# Altium PCB miaow-foc-board.pcbdoc (part 10 of 10)
Units mil, origin at the board's own origin, x right, y up, seen from the top; angles counter-clockwise.
Board outline 2755.91 x 3149.61 mil, 6 copper layers (SIG1, GND2, SIG3, PWR4, GND5, SIG6), stack 60.566 mil thick; 437 components, 392 nets, 2120 pads, 1697 vias.
Unrouted connection lines stored in the file: 1090.
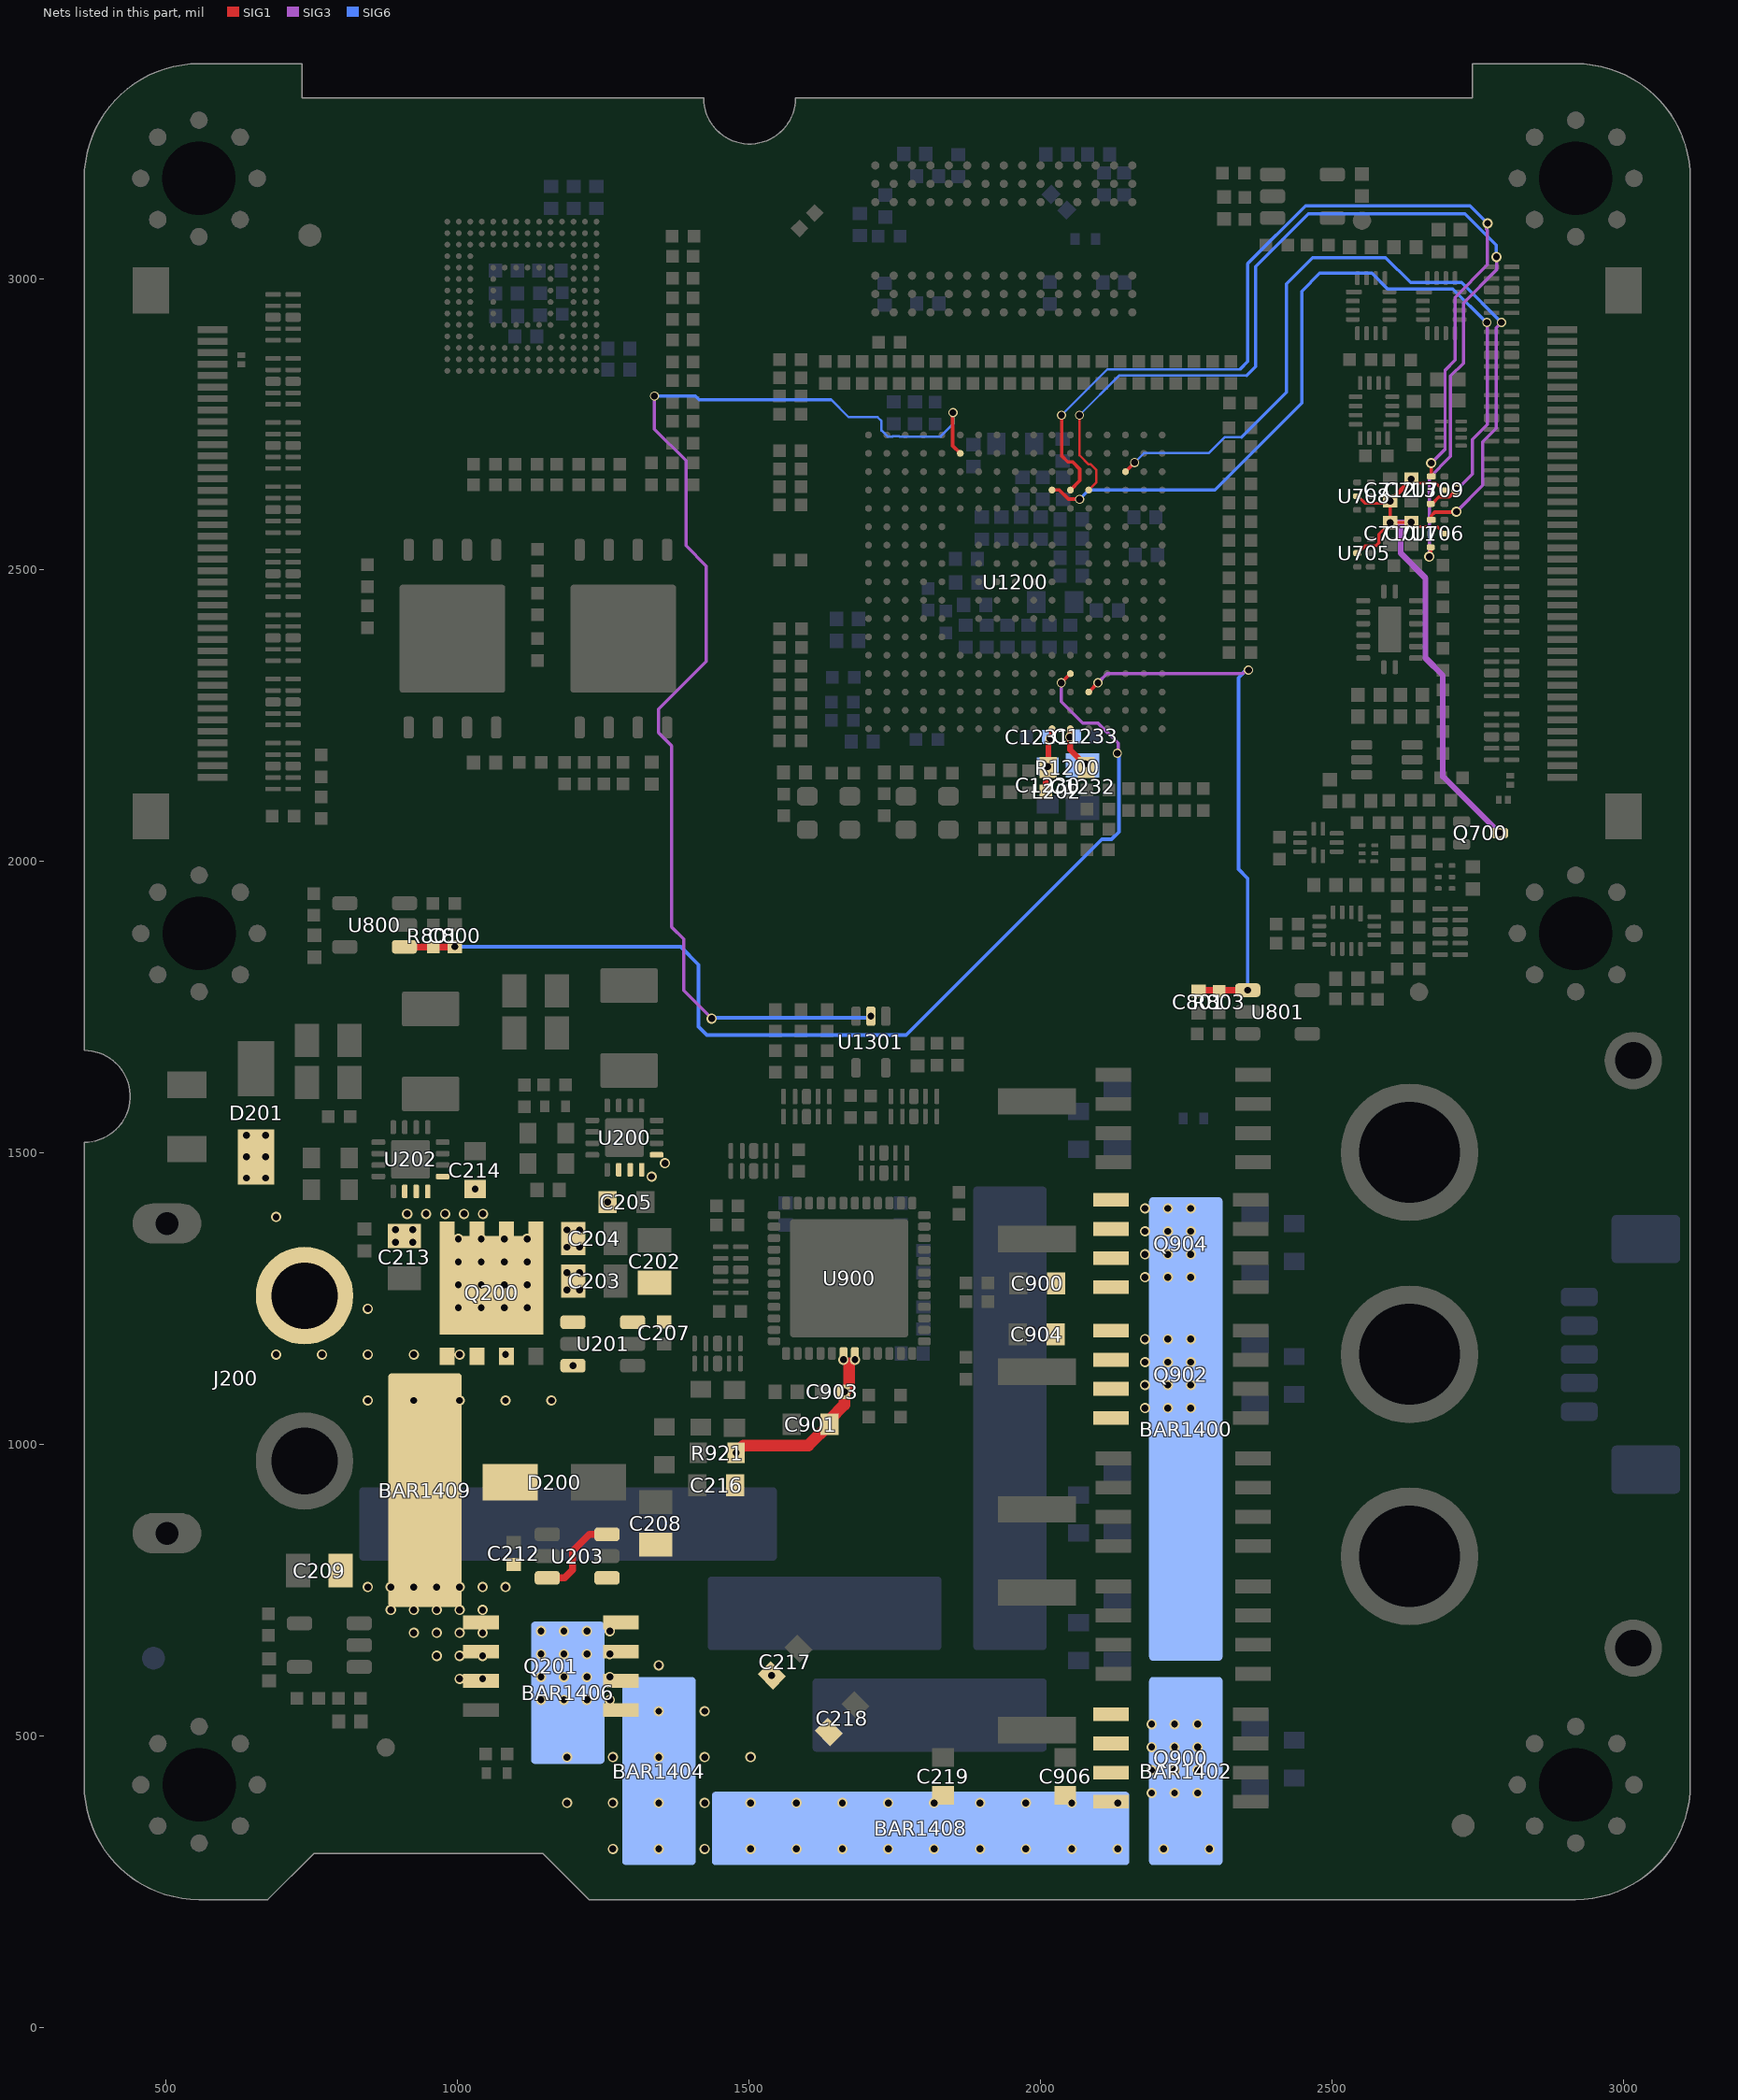
[diagram p13: the nets of this part, all layers, seen from the top]

## Via types
v1: diameter 17.72, hole 11.81, SIG1 to SIG6, tented both sides, 1223 vias
v2: diameter 15.75, hole 11.81, SIG1 to SIG6, tented both sides, 453 vias
v3: diameter 17.72, hole 11.81, SIG1 to SIG6, tented top, 21 vias

## Nets (pads, with @x,y where several pads share a name; then routed paths per layer and width w, separated by ;. In a path a pad name is that pad's centre, name@x,y a point inside that pad or via, vN(x,y) a via of type N, cw(c..) or ccw(c..) an arc to the next point about the centre after c; other vN are vias at no path point) (continued)
TMP_CH0: C801.1 R803.1 U801.1 U1200.N3 | length 942.8
  SIG1 w6: U1200.N3@2083.05,2290.85 v2(2098.79,2306.59)
  SIG1 w12: C801.1@2271.7,1777.69 2273.29,1779.28 v1(2355.75,1779.28)
  SIG3 w6: v2(2098.79,2306.59) 2114.54,2322.34 2347.14,2322.34 2353.14,2328.34 v2@2361.56,2328.34
  SIG6 w6: v1(2355.75,1779.28) 2355.75,1971.05 2339.95,1986.85 2339.95,2315.19 2353.1,2328.34 v2@2356.06,2328.34
  other v2: 2357.06,2328.34
TMP_CH1: C800.1 R801.1 U800.1 U1200.M4 | length 1830
  SIG1 w6: v2(2035.8,2306.59) U1200.M4@2051.55,2322.34
  SIG1 w12: U800.1@908.85,1853.6 908.99,1853.74 v1(995.25,1853.74)
  SIG3 w6: v2(2035.8,2306.59) 2035.8,2274.39 2072.67,2237.53 2098.86,2237.53 2133.53,2202.85 v2@2133.53,2185.71
  SIG6 w6: v1(995.25,1853.74) 1382.71,1853.74 1413.48,1822.96 1413.48,1716.63 1427.87,1702.24 1769.74,1702.24 2105.56,2038.07 2122.21,2038.07 2134.91,2050.77 2134.91,2184.34 v2@2133.53,2185.71
  other v2: 2132.03,2185.71
TO_DBG0: U706.1 U1200.R15 | length 1362.5
  SIG1 w6: U1200.R15@2146.04,2668.8 v2(2161.79,2684.55) ; U706.1@2670.8,2586.22 2670.8,2593.52 2676.73,2599.45 2713.13,2599.45 v1(2713.85,2600.17)
  SIG3 w5.5: v1(2713.85,2600.17) 2759.04,2645.36 2759.04,2719.89 2782.44,2743.29 2782.44,2916 v2(2791.28,2924.84)
  SIG6 w4: v2(2161.79,2684.55) 2177.76,2700.52 2288.96,2700.52 2316.7,2728.26 2345.64,2728.26
  SIG6 w5.5: 2345.64,2728.26 2422.1,2804.71 2422.1,2991.19 2466.95,3036.05 2592.38,3036.05 2635.22,2993.21 2722.92,2993.21 v2(2791.28,2924.84)
TO_DBG1: U706.3 U1200.N14 | length 1734.2
  SIG1 w4: v2@2067.14,2771.57 2067.14,2696.91 2082.62,2681.44 2086.65,2681.44 2095.87,2672.22 2095.87,2650.13 U1200.N14@2083.05,2637.3 ; v1(2667.32,2522.99) v1@2669.81,2525.49
  SIG1 w6: v1@2669.81,2525.49 U706.3@2669.81,2538.97
  SIG3 w5.5: v1(2667.32,2522.99) 2667.32,2658.63 2703.81,2695.12 2703.81,2832.85 2725.87,2854.9 2725.87,2958.48 2782.69,3015.3 v1@2782.69,3037.27
  SIG6 w4: v2(2067.14,2765.73) 2135.44,2834.02 2354.27,2834.02
  SIG6 w5.5: 2354.27,2834.02 2369.21,2848.96 2369.21,3020.66 2459.75,3111.2 2728.31,3111.2 2782.19,3057.32 2782.19,3037.77 v1(2782.66,3037.3)
TO_DBG2: U709.1 U1200.M14 | length 1620.7
  SIG1 w6: v2@2035.28,2768.44 2036.46,2767.26 2036.46,2696.3 2047.24,2685.52 2055.45,2685.52 2067.6,2673.37 2067.6,2653.36 U1200.M14@2051.55,2637.3 ; v1@2670.75,2681.25 2670.8,2681.19 U709.1@2670.8,2660.74
  SIG3 w5.5: v1(2670.75,2683.63) 2694.4,2707.28 2694.4,2842.84 2711.62,2860.06 2711.62,2968.08 2767.28,3023.74 2767.28,3083.04 2765.18,3085.15 2765.18,3092.48 v1(2767.47,3094.78)
  SIG6 w4: v2(2036.28,2765.73) 2115.25,2844.69 2131.6,2844.69 2131.7,2844.59 2142.78,2844.59 2142.89,2844.69 2163.22,2844.69 2163.33,2844.59 2174.4,2844.59 2174.51,2844.69 2342.9,2844.69
  SIG6 w5.5: 2342.9,2844.69 2355.99,2857.78 2355.99,3025.88 2455.19,3125.08 2737.17,3125.08 v1(2767.47,3094.78)
TO_DBG3: U709.3 U1200.L14 | length 1423.5
  SIG1 w5.5: 2683.76,2625.47 2701.67,2625.47 v1(2713.79,2637.6)
  SIG1 w6: U1200.L14@2020.05,2637.3 2032.67,2637.3 2048.3,2621.67 v2@2067.6,2621.67 ; U709.3@2669.81,2613.5 2671.79,2613.5 2683.76,2625.47
  SIG3 w5.5: v1(2713.79,2637.6) 2741.2,2665 2741.2,2724.32 2766.68,2749.81 2766.68,2924.33 v2(2766.17,2924.84)
  SIG6 w5.5: v2(2067.3,2621.55) 2083.25,2637.51 2299.66,2637.51 2448.54,2786.39 2448.54,2978.53 2479.49,3009.48 2568.73,3009.48 2595.88,2982.34 2707.67,2982.34 v2@2765.17,2924.84
TO_DRV_EN: U1200.F16 U1301.2 | length 2107.8
  SIG1 w6: v2@1850.16,2770.71 1849.51,2770.07 1849.51,2713.35 U1200.F16@1862.57,2700.29
  SIG3 w5.5: v2(1337.81,2798.7) 1337.81,2741.62 1391.78,2687.65 1391.78,2633.41 1391.78,2541.75 1426.85,2506.68 1426.85,2343.47 1345.1,2261.71 1345.1,2220.97 1367.54,2198.53 1367.54,1887.49 1387.93,1867.09 1387.93,1778.72 v1(1436.15,1730.51)
  SIG6 w4: 1640.85,2792.51 1671.02,2762.34 1720.8,2762.34 1727.56,2755.59 1727.56,2739.6 1738.09,2729.07 1746.45,2729.07 1746.8,2729.42 1757.88,2729.42 1758.22,2729.07 1828.85,2729.07 1850.49,2750.71 v2@1850.49,2770.86
  SIG6 w5.5: v2(1337.81,2798.7) 1408.27,2798.7 1414.46,2792.51 1640.85,2792.51
  SIG6 w6: v1(1436.15,1730.51) 1437.78,1732.14 1706.58,1732.14 v2(1709.14,1734.7)
  other v2: 1850.16,2770.21
VBAT: C203.2 C204.2 C205.2 C213.2 C214.2 Q200.5 Q200.6 Q200.7 Q200.8 U200.10 U200.11 U200.12 U200.13 U201.4 U202.10 U202.11 U202.12 U202.13
  other v1: 1001.27,1234.53 1040.64,1234.53 1080.01,1234.53 1119.38,1234.53 1187.45,1265.14 1209.23,1265.14 1001.27,1273.9 1040.64,1273.9 1080.01,1273.9 1119.38,1273.9 1187.45,1294.8 1209.23,1294.8 1001.27,1313.27 1040.64,1313.27 1080.01,1313.27 1119.38,1313.27 1187.43,1338.38 1209.21,1338.38 893.69,1346.8 923.35,1346.8 1001.27,1352.64 1040.64,1352.64 1080.01,1352.64 1119.38,1352.64 1187.43,1368.05 1209.21,1368.05 893.69,1368.58 923.35,1368.58 913.5,1395.54 946.01,1395.54 978.51,1395.54 1011.02,1395.54 1043.53,1395.54 1257.32,1415.95 1030.08,1438.1 1332.94,1459.4 1355.93,1482.38
VDBG_C: C710.2 C711.1 C712.2 C713.2 Q700.D U705.5 U706.5 U708.5 U709.5 | length 1046
  SIG1 w5: U708.5@2543.63,2628.3 2557,2614.93 2596.65,2614.93 v1(2600.16,2618.44) v1(2600.16,2581.51) C711.1@2636.24,2581.51 ; U705.5@2543.79,2529.18 2544.54,2529.18 2556.92,2541.56 2559.18,2541.56 2559.29,2541.44 2575.52,2541.44 2580.97,2546.89 2580.97,2561.83 C710.2@2600.4,2581.26 ; v1(2636.61,2581.88) 2644.08,2574.41 2681.62,2574.41 U706.5@2693.44,2562.59 ; v1(2636.61,2656.24) 2643.91,2648.93 2679.26,2648.93 2691.07,2637.12 U709.5@2693.44,2637.12
  SIG1 w8: v1(2600.16,2618.44) 2636.61,2654.89 v1(2636.61,2656.24) ; C711.1@2636.24,2581.51 v1(2636.61,2581.88)
  SIG3 w10: v1(2600.16,2581.51) 2618.58,2581.51 ; v1(2636.61,2581.88) 2618.95,2581.88 2618.26,2581.19 2618.26,2528.91 2660.8,2486.37 2660.8,2349.28 2690.64,2319.44 2690.64,2146.14 v1(2787.81,2048.97)
VIN: BAR1409.1 C202.2 C207.1 C209.2 C212.1 D200.2 D201.2 J200.2 Q200.1 Q200.2 Q200.3 Q201.1 Q201.2 Q201.3 U201.3 U201.6 U203.3 U203.6 | length 152.2
  SIG1 w12: U203.3@1153.91,770.98 1183.55,770.98 1197.23,784.66 1197.23,816.78 1226.24,845.79 U203.6@1256.27,845.79
  other v1: 1003.51,597.92 1042.88,597.92 964.14,637.29 1003.51,637.29 1042.88,637.29 924.77,676.66 964.14,676.66 1003.51,676.66 1042.88,676.66 885.4,716.04 924.77,716.04 964.14,716.04 1003.51,716.04 1042.88,716.04 846.03,755.41 885.4,755.41 924.77,755.41 964.14,755.41 1003.51,755.41 1042.88,755.41 1082.25,755.41 846.03,1075.37 924.77,1075.37 1003.51,1075.37 1082.25,1075.37 1160.99,1075.37 1197.92,1135.01 688.55,1154.11 767.29,1154.11 846.03,1154.11 924.77,1154.11 1003.51,1154.11 1082.25,1154.11 846.03,1232.85 688.55,1390.33 637.78,1457.06 670.28,1457.06 637.78,1493.57 670.28,1493.57 637.78,1530.08 670.28,1530.08
VMCUA: C1230.2 C1231.2 L202.2 R1200.1 U1200.L1 | length 113.3
  SIG1 w8: R1200.1@2009.53,2158.13 R1200.1@2011.73,2160.32
  SIG1 w10: L202.2@2009.53,2119.04 R1200.1@2009.53,2158.13 ; v1(2012.53,2162.9) 2012.53,2161.52 2013.73,2160.32 2013.73,2176.02 2013.73,2208.74 v2@2015.75,2210.76 ; v2@2015.75,2212.85 2019.85,2216.95 2019.85,2227.65 U1200.L1@2020.05,2227.85
  other v2: 2016.25,2210.76
VMOT: BAR1400.1 BAR1402.1 BAR1404.1 BAR1406.1 BAR1408.1 C208.2 C216.2 C217.2 C218.2 C219.2 C900.2 C901.2 C903.2 C904.2 C906.2 Q201.5 Q201.6 Q201.7 Q201.8 Q900.5 Q900.6 Q900.7 Q900.8 Q902.5 Q902.6 Q902.7 Q902.8 Q904.5 Q904.6 Q904.7 Q904.8 R921.1 U203.4 U900.6 U900.7 | length 298.7
  SIG1 w20: v1(1478.04,985.54) 1490.72,998.22 1602.1,998.22 C901.2@1638.29,1034.41 ; C901.2@1638.29,1034.49 1638.29,1042.63 1663.58,1067.93 v1(1663.58,1090.09) 1671.6,1098.1 1671.6,1138.87
  other v1: 1266.51,306.07 1345.25,306.07 1423.99,306.07 1502.73,306.07 1581.47,306.07 1660.21,306.07 1738.95,306.07 1817.69,306.07 1896.43,306.07 1975.17,306.07 2053.91,306.07 2132.65,306.07 2211.39,306.07 2290.13,306.07 1187.77,384.81 1266.51,384.81 1345.25,384.81 1423.99,384.81 1502.73,384.81 1581.47,384.81 1660.21,384.81 1738.95,384.81 1817.69,384.81 1896.43,384.81 1975.17,384.81 2053.91,384.81 2132.65,384.81 2190.92,401.99 2230.29,401.99 2269.66,401.99 2190.92,441.36 2230.29,441.36 2269.66,441.36 1187.77,463.55 1266.51,463.55 1345.25,463.55 1423.99,463.55 1502.73,463.55 2190.92,480.73 2230.29,480.73 2269.66,480.73 2190.92,520.1 2230.29,520.1 2269.66,520.1 1345.25,542.29 1423.99,542.29 1143.11,561.62 1182.48,561.62 1221.85,561.62 1261.22,561.62 1143.11,600.99 1182.48,600.99 1221.85,600.99 1261.22,600.99 1539.03,603.7 1345.25,621.03 1143.11,640.36 1182.48,640.36 1221.85,640.36 1261.22,640.36 1143.11,679.73 1182.48,679.73 1221.85,679.73 1261.22,679.73 2179.48,1062.43 2218.85,1062.43 2258.22,1062.43 2179.48,1101.8 2218.85,1101.8 2258.22,1101.8 2179.48,1141.17 2218.85,1141.17 2258.22,1141.17 1662.13,1145.27 1681.81,1145.27 2179.48,1180.54 2218.85,1180.54 2258.22,1180.54 2179.48,1286.84 2218.85,1286.84 2258.22,1286.84 2179.48,1326.21 2218.85,1326.21 2258.22,1326.21 2179.48,1365.58 2218.85,1365.58 2258.22,1365.58 2179.48,1404.95 2218.85,1404.95 2258.22,1404.95
VREF+: C1232.2 C1233.2 R1200.2 U1200.M1 | length 72
  SIG1 w10: U1200.M1@2051.55,2227.85 2051.4,2227.71 2051.4,2213.77 2051.26,2213.62 2051.26,2191.7 2067.92,2175.04 2075.21,2167.76 v1(2077.11,2167.76)
  other v2: 2050.26,2213.62
pads on no net: J200.3 J200.4 J600. J700. J900. MARKPOINT1400. MARKPOINT1401. MARKPOINT1402. MARKPOINT1403. POSHOLE1400. POSHOLE1401. POSHOLE1402. POSHOLE1403. POSHOLE1404. POSHOLE1405. U300.E3 U300.E7 U300.H3 U300.H7 U300.K2 U300.K3 U400.A7 U400.A9 U400.A10 U400.A11 U400.A12 U400.A13 U400.A14 U400.B8 U400.B9 U400.B10 U400.B11 U400.B12 U400.B13 U400.B14 U400.C1 U400.C7 U400.C8 U400.C9 U400.C10 U400.C11 U400.C12 U400.C13 U400.C14 U400.D4 U400.D12 U400.D13 U400.D14 U400.E3 U400.E5 U400.E8 U400.E9 U400.E10 U400.E12 U400.E13 U400.E14 U400.F1 U400.F2 U400.F3 U400.F10 U400.F12 U400.F13 U400.F14 U400.G1 U400.G2 U400.G3 U400.G10 U400.G12 U400.G13 U400.G14 U400.H1 U400.H2 U400.H3 U400.H12 U400.H13 U400.H14 U400.J1 U400.J2 U400.J3 U400.J12 U400.J13 U400.J14 U400.K1 U400.K2 U400.K3 U400.K6 U400.K7 U400.K10 U400.K12 U400.K13 U400.K14 U400.L1 U400.L2 U400.L3 U400.L12 U400.L13 U400.L14 U400.M1 U400.M2 U400.M3 U400.M7 U400.M8 U400.M9 U400.M10 U400.M11 U400.M12 U400.M13 U400.M14 U400.N3 U400.N6 U400.N7 U400.N8 U400.N9 U400.N10 U400.N11 U400.N12 U400.N13 U400.N14 U400.P1 U400.P2 U400.P7 U400.P8 U400.P9 U400.P10 U400.P11 U400.P12 U400.P13 U400.P14 U701.1 U701.5 U704.10 U714.8 U714.12 U717.4 U717.5 U717.6 U717.7 U718.5 U718.6 U900.1 U900.44 U900.45 U900.46 U1000.8 U1001.5 U1001.6 U1200.A5 U1200.A12 U1200.A13 U1200.C1 U1200.E1 U1200.E3 U1200.E13 U1200.H15 U1200.J1 U1200.K16 U1200.K17 U1200.L16 U1200.L17 U1200.M16 U1200.M17 U1200.N13 U1200.N15 U1200.N17 U1200.R1 U1200.R2 U1200.R6 U1200.R12 U1200.T14 U1200.U14

## Polygon pours and split planes (outlines as drawn)
GDRVP on SIG6 "GDRVP_L06_P000" (solid, remove dead copper, pour order 0): 620.49,837.29 731.98,725.8 1320.01,725.8 1597.09,448.72 2036.34,448.72 2139.22,551.6 2139.22,584.12 2055.38,584.12 2027.32,612.18 2027.32,708.22 2100.27,781.17 2100.17,795.86 2087.46,808.57 2027.32,808.57 2027.32,928.95 2071.21,972.83 2071.21,1429.55 2022.1,1478.66 1787.06,1478.66 1787.06,1053.19 1653.67,1053.19 661,1053.19 620.49,1012.68
GDRVP on PWR4 (split plane): 681.76,1433.77 613.26,1433.77 609.34,1433.46 605.51,1432.54 601.88,1431.04 598.52,1428.98 595.53,1426.42 592.97,1423.43 590.92,1420.08 589.41,1416.44 588.49,1412.62 588.19,1408.69 588.19,524.39 588.49,520.47 589.41,516.64 590.92,513.01 592.97,509.65 595.53,506.66 598.52,504.1 601.88,502.05 605.51,500.54 609.34,499.62 613.26,499.31 1093.07,499.31 1093.07,318.02 753.06,318.02 749.14,317.63 745.37,316.49 741.89,314.63 738.85,312.13 665.99,239.28 556.21,239.28 544.62,239.28 521.65,242.3 499.27,248.3 477.87,257.16 457.8,268.75 439.42,282.85 423.03,299.24 408.93,317.62 397.34,337.69 388.48,359.09 382.48,381.47 379.46,404.45 379.46,416.03 379.46,1500.74 386.14,1502.07 389.91,1503.22 404.17,1509.12 406.02,1510.12 407.64,1510.98 420.48,1519.56 421.02,1520 423.52,1522.05 434.44,1532.97 435.32,1534.05 436.94,1536.02 438.77,1538.76 681.76,1538.76
VIN on PWR4 (split plane): 919.02,1161.05 922.01,1158.5 925.37,1156.44 929,1154.93 932.83,1154.02 936.75,1153.71 1230.23,1153.71 1230.23,750.37 1118.15,750.37 1114.22,750.06 1110.4,749.15 1106.76,747.64 1103.41,745.58 1100.41,743.03 1097.86,740.04 1095.8,736.68 1094.3,733.05 1093.38,729.22 1093.07,725.3 1093.07,549.47 638.34,549.47 638.34,1383.62 696.45,1383.62
+5V on PWR4 (split plane): 777.73,2249.04 778.02,2246.1 778.88,2243.28 780.27,2240.67 782.14,2238.39 1042.84,1977.68 1042.84,1428.29 731.92,1428.29 731.92,1563.84 731.61,1567.76 730.69,1571.59 729.19,1575.23 727.13,1578.58 724.57,1581.57 723.8,1582.23 723.8,1941.89 723.51,1944.83 722.65,1947.65 721.26,1950.26 719.39,1952.54 584.63,2087.3 584.63,2966.74 777.73,2966.74
+3V3 on PWR4 (split plane): 178 vertices, not listed, extent 379.46,937.89 3095.17,3348.69
VMOT on PWR4 (split plane): 2279.25,348.39 2279.25,239.28 1233.82,239.28 1160.97,312.13 1157.93,314.63 1154.45,316.49 1150.68,317.63 1146.76,318.02 1143.22,318.02 1143.22,700.22 1255.31,700.22 1259.23,700.53 1263.06,701.45 1266.69,702.95 1270.05,705.01 1273.04,707.56 1275.6,710.56 1277.65,713.91 1279.16,717.55 1280.08,721.37 1280.39,725.3 1280.39,1153.71 1829.16,1153.71 1833.09,1154.02 1836.91,1154.93 1840.55,1156.44 1843.9,1158.5 1846.9,1161.05 1849.45,1164.04 1851.51,1167.4 1853.01,1171.03 1853.93,1174.86 1854.24,1178.78 1854.24,1628.59 2279.25,1628.59
GDRVP on PWR4 (split plane): 3095.17,416.03 3095.17,404.45 3092.14,381.47 3086.15,359.09 3077.28,337.69 3065.69,317.62 3051.59,299.24 3035.21,282.85 3016.82,268.75 2996.76,257.16 2975.35,248.3 2952.97,242.3 2930,239.28 2918.41,239.28 2329.41,239.28 2329.41,323.31 2808.25,323.31 2812.18,323.62 2816,324.54 2819.64,326.04 2822.99,328.1 2825.99,330.65 2828.54,333.65 2830.6,337 2832.1,340.64 2833.02,344.46 2833.33,348.39 2833.33,887.74 3095.17,887.74
DRV_PHASE_A on PWR4 (split plane): 2783.18,373.46 2329.41,373.46 2329.41,783.82 2397.79,783.82 2400.73,784.11 2403.56,784.97 2406.16,786.36 2408.45,788.24 2540.14,919.93 2783.18,919.93
DRV_PHASE_B on PWR4 (split plane): 2783.18,950.07 2533.9,950.07 2530.96,949.78 2528.13,948.93 2525.52,947.53 2523.24,945.66 2391.55,813.97 2329.41,813.97 2329.41,1228.08 2501.39,1228.08 2504.33,1228.37 2507.15,1229.23 2509.76,1230.62 2512.04,1232.49 2587.52,1307.98 2783.18,1307.98
DRV_PHASE_C on PWR4 (split plane): 2783.18,1338.12 2581.28,1338.12 2578.34,1337.83 2575.51,1336.97 2572.91,1335.58 2570.62,1333.71 2495.14,1258.22 2329.41,1258.22 2329.41,1628.59 2783.18,1628.59
GDRVP on GND2 (split plane): 2279.22,341.49 2279.53,337.57 2280.45,333.74 2281.95,330.11 2284.01,326.75 2286.56,323.76 2289.56,321.2 2292.91,319.15 2296.55,317.64 2300.37,316.72 2304.3,316.41 2808.25,316.41 2812.18,316.72 2816,317.64 2819.64,319.15 2822.99,321.2 2825.99,323.76 2828.54,326.75 2830.6,330.11 2832.1,333.74 2833.02,337.57 2833.33,341.49 2833.33,887.74 3095.17,887.74 3095.17,416.03 3095.17,404.45 3092.14,381.47 3086.15,359.09 3077.28,337.69 3065.69,317.62 3051.59,299.24 3035.21,282.85 3016.82,268.75 2996.76,257.16 2975.35,248.3 2952.97,242.3 2930,239.28 2918.41,239.28 1233.82,239.28 1160.97,312.13 1157.93,314.63 1154.45,316.49 1150.68,317.63 1146.76,318.02 753.06,318.02 749.14,317.63 745.37,316.49 741.89,314.63 738.85,312.13 665.99,239.28 556.21,239.28 544.62,239.28 521.65,242.3 499.27,248.3 477.87,257.16 457.8,268.75 439.42,282.85 423.03,299.24 408.93,317.62 397.34,337.69 388.48,359.09 382.48,381.47 379.46,404.45 379.46,416.03 379.46,1500.74 386.14,1502.07 389.91,1503.22 404.17,1509.12 406.02,1510.12 407.64,1510.98 420.48,1519.56 421.02,1520 423.52,1522.05 434.44,1532.97 435.32,1534.05 436.94,1536.02 438.77,1538.76 681.76,1538.76 681.76,1408.69 682.07,1404.77 682.99,1400.94 684.5,1397.31 686.55,1393.95 689.11,1390.96 959.66,1120.41 962.66,1117.85 966.01,1115.79 969.65,1114.29 973.47,1113.37 977.4,1113.06 1829.16,1113.06 1833.09,1113.37 1836.91,1114.29 1840.55,1115.79 1843.9,1117.85 1846.9,1120.41 1849.45,1123.4 1851.51,1126.75 1853.01,1130.39 1853.93,1134.21 1854.24,1138.14 1854.24,1628.59 2279.22,1628.59
GDRVA on GND2 (split plane): 2952.97,3345.67 2975.35,3339.67 2996.76,3330.8 3016.82,3319.22 3035.21,3305.11 3051.59,3288.73 3065.69,3270.35 3077.28,3250.28 3086.15,3228.87 3092.14,3206.49 3095.17,3183.52 3095.17,3171.94 3095.17,937.89 2833.33,937.89 2833.33,1653.67 2833.02,1657.59 2832.1,1661.41 2830.6,1665.05 2828.54,1668.41 2825.99,1671.4 2822.99,1673.95 2819.64,1676.01 2816,1677.52 2812.18,1678.43 2808.25,1678.74 1829.16,1678.74 1825.24,1678.43 1821.42,1677.52 1817.78,1676.01 1814.42,1673.95 1811.43,1671.4 1808.88,1668.41 1806.82,1665.05 1805.31,1661.41 1804.4,1657.59 1804.09,1653.67 1804.09,1163.21 987.78,1163.21 731.92,1419.08 731.92,1563.84 731.61,1567.76 730.69,1571.59 729.19,1575.23 727.13,1578.58 724.57,1581.57 721.58,1584.13 718.23,1586.19 714.59,1587.69 710.76,1588.61 706.84,1588.92 457.77,1588.92 457.82,1589.41 457.82,1604.85 457.43,1608.77 454.42,1623.91 453.28,1627.68 447.37,1641.94 446.58,1643.41 445.51,1645.42 436.94,1658.25 434.44,1661.3 423.52,1672.21 420.48,1674.71 407.64,1683.29 405.63,1684.36 404.17,1685.14 389.91,1691.05 386.14,1692.19 379.46,1693.52 379.46,3171.94 379.46,3183.52 382.48,3206.49 388.48,3228.87 397.34,3250.28 408.93,3270.35 423.03,3288.73 439.42,3305.11 457.8,3319.22 477.87,3330.8 499.27,3339.67 521.65,3345.67 544.62,3348.69 713.28,3348.69 713.28,3309.73 713.66,3305.81 714.81,3302.04 716.66,3298.57 719.16,3295.52 722.21,3293.02 725.68,3291.16 729.45,3290.02 733.37,3289.63 1404.7,3289.63 1406.03,3282.95 1406.56,3281.2 1407.17,3279.18 1413.08,3264.92 1413.95,3263.31 1414.94,3261.45 1423.51,3248.61 1426.01,3245.57 1436.93,3234.65 1439.97,3232.15 1452.81,3223.58 1456.28,3221.72 1470.54,3215.81 1472.43,3215.24 1474.31,3214.67 1489.45,3211.66 1492.99,3211.31 1493.37,3211.27 1508.81,3211.27 1512.73,3211.66 1527.87,3214.67 1529.62,3215.2 1531.64,3215.82 1545.9,3221.72 1547.52,3222.59 1549.37,3223.58 1562.21,3232.16 1565.25,3234.65 1576.17,3245.57 1578.67,3248.61 1587.24,3261.45 1589.1,3264.92 1595.01,3279.18 1595.58,3281.07 1596.15,3282.95 1597.48,3289.64 2741.48,3289.63 2745.4,3290.02 2749.17,3291.16 2752.65,3293.02 2755.69,3295.52 2758.19,3298.57 2760.05,3302.04 2761.19,3305.81 2761.58,3309.73 2761.58,3348.69 2930,3348.69
DRV_PHASE_A on GND2 (split plane): 2783.18,366.57 2329.37,366.57 2329.37,783.82 2397.79,783.82 2400.73,784.11 2403.56,784.97 2406.16,786.36 2408.45,788.24 2540.14,919.93 2783.18,919.93
DRV_PHASE_C on GND2 (split plane): 2783.18,1338.12 2581.28,1338.12 2578.34,1337.83 2575.51,1336.97 2572.91,1335.58 2570.62,1333.71 2495.14,1258.22 2329.37,1258.22 2329.37,1628.59 2783.18,1628.59
DRV_PHASE_B on GND2 (split plane): 2783.18,950.07 2533.9,950.07 2530.96,949.78 2528.13,948.93 2525.52,947.53 2523.24,945.66 2391.55,813.97 2329.37,813.97 2329.37,1228.08 2501.39,1228.08 2504.33,1228.37 2507.15,1229.23 2509.76,1230.62 2512.04,1232.49 2587.52,1307.98 2783.18,1307.98
GDRVP on GND5 (split plane): 2279.22,341.49 2279.53,337.57 2280.45,333.74 2281.95,330.11 2284.01,326.75 2286.56,323.76 2289.56,321.2 2292.91,319.15 2296.55,317.64 2300.37,316.72 2304.3,316.41 2808.25,316.41 2812.18,316.72 2816,317.64 2819.64,319.15 2822.99,321.2 2825.99,323.76 2828.54,326.75 2830.6,330.11 2832.1,333.74 2833.02,337.57 2833.33,341.49 2833.33,887.74 3095.17,887.74 3095.17,416.03 3095.17,404.45 3092.14,381.47 3086.15,359.09 3077.28,337.69 3065.69,317.62 3051.59,299.24 3035.21,282.85 3016.82,268.75 2996.76,257.16 2975.35,248.3 2952.97,242.3 2930,239.28 2918.41,239.28 1233.82,239.28 1160.97,312.13 1157.93,314.63 1154.45,316.49 1150.68,317.63 1146.76,318.02 753.06,318.02 749.14,317.63 745.37,316.49 741.89,314.63 738.85,312.13 665.99,239.28 556.21,239.28 544.62,239.28 521.65,242.3 499.27,248.3 477.87,257.16 457.8,268.75 439.42,282.85 423.03,299.24 408.93,317.62 397.34,337.69 388.48,359.09 382.48,381.47 379.46,404.45 379.46,416.03 379.46,1500.74 386.14,1502.07 389.91,1503.22 404.17,1509.12 406.02,1510.12 407.64,1510.98 420.48,1519.56 421.02,1520 423.52,1522.05 434.44,1532.97 435.32,1534.05 436.94,1536.02 438.77,1538.76 681.76,1538.76 681.76,1408.69 682.07,1404.77 682.99,1400.94 684.5,1397.31 686.55,1393.95 689.11,1390.96 959.66,1120.41 962.66,1117.85 966.01,1115.79 969.65,1114.29 973.47,1113.37 977.4,1113.06 1829.16,1113.06 1833.09,1113.37 1836.91,1114.29 1840.55,1115.79 1843.9,1117.85 1846.9,1120.41 1849.45,1123.4 1851.51,1126.75 1853.01,1130.39 1853.93,1134.21 1854.24,1138.14 1854.24,1628.59 2279.22,1628.59
GDRVA on GND5 (split plane): 2952.97,3345.67 2975.35,3339.67 2996.76,3330.8 3016.82,3319.22 3035.21,3305.11 3051.59,3288.73 3065.69,3270.35 3077.28,3250.28 3086.15,3228.87 3092.14,3206.49 3095.17,3183.52 3095.17,3171.94 3095.17,937.89 2833.33,937.89 2833.33,1653.67 2833.02,1657.59 2832.1,1661.41 2830.6,1665.05 2828.54,1668.41 2825.99,1671.4 2822.99,1673.95 2819.64,1676.01 2816,1677.52 2812.18,1678.43 2808.25,1678.74 1829.16,1678.74 1825.24,1678.43 1821.42,1677.52 1817.78,1676.01 1814.42,1673.95 1811.43,1671.4 1808.88,1668.41 1806.82,1665.05 1805.31,1661.41 1804.4,1657.59 1804.09,1653.67 1804.09,1163.21 987.78,1163.21 731.92,1419.08 731.92,1563.84 731.61,1567.76 730.69,1571.59 729.19,1575.23 727.13,1578.58 724.57,1581.57 721.58,1584.13 718.23,1586.19 714.59,1587.69 710.76,1588.61 706.84,1588.92 457.77,1588.92 457.82,1589.41 457.82,1604.85 457.43,1608.77 454.42,1623.91 453.28,1627.68 447.37,1641.94 446.58,1643.41 445.51,1645.42 436.94,1658.25 434.44,1661.3 423.52,1672.21 420.48,1674.71 407.64,1683.29 405.63,1684.36 404.17,1685.14 389.91,1691.05 386.14,1692.19 379.46,1693.52 379.46,3171.94 379.46,3183.52 382.48,3206.49 388.48,3228.87 397.34,3250.28 408.93,3270.35 423.03,3288.73 439.42,3305.11 457.8,3319.22 477.87,3330.8 499.27,3339.67 521.65,3345.67 544.62,3348.69 713.28,3348.69 713.28,3309.73 713.66,3305.81 714.81,3302.04 716.66,3298.57 719.16,3295.52 722.21,3293.02 725.68,3291.16 729.45,3290.02 733.37,3289.63 1404.7,3289.63 1406.03,3282.95 1406.56,3281.2 1407.17,3279.18 1413.08,3264.92 1413.95,3263.31 1414.94,3261.45 1423.51,3248.61 1426.01,3245.57 1436.93,3234.65 1439.97,3232.15 1452.81,3223.58 1456.28,3221.72 1470.54,3215.81 1472.43,3215.24 1474.31,3214.67 1489.45,3211.66 1492.99,3211.31 1493.37,3211.27 1508.81,3211.27 1512.73,3211.66 1527.87,3214.67 1529.62,3215.2 1531.64,3215.82 1545.9,3221.72 1547.52,3222.59 1549.37,3223.58 1562.21,3232.16 1565.25,3234.65 1576.17,3245.57 1578.67,3248.61 1587.24,3261.45 1589.1,3264.92 1595.01,3279.18 1595.58,3281.07 1596.15,3282.95 1597.48,3289.64 2741.48,3289.63 2745.4,3290.02 2749.17,3291.16 2752.65,3293.02 2755.69,3295.52 2758.19,3298.57 2760.05,3302.04 2761.19,3305.81 2761.58,3309.73 2761.58,3348.69 2930,3348.69
DRV_PHASE_A on GND5 (split plane): 2783.18,366.57 2329.37,366.57 2329.37,783.82 2397.79,783.82 2400.73,784.11 2403.56,784.97 2406.16,786.36 2408.45,788.24 2540.14,919.93 2783.18,919.93
DRV_PHASE_C on GND5 (split plane): 2783.18,1338.12 2581.28,1338.12 2578.34,1337.83 2575.51,1336.97 2572.91,1335.58 2570.62,1333.71 2495.14,1258.22 2329.37,1258.22 2329.37,1628.59 2783.18,1628.59
DRV_PHASE_B on GND5 (split plane): 2783.18,950.07 2533.9,950.07 2530.96,949.78 2528.13,948.93 2525.52,947.53 2523.24,945.66 2391.55,813.97 2329.37,813.97 2329.37,1228.08 2501.39,1228.08 2504.33,1228.37 2507.15,1229.23 2509.76,1230.62 2512.04,1232.49 2587.52,1307.98 2783.18,1307.98

## Other copper
SIG1:
  rectangle net VMOT: 2010.59,1169.91 2154.74,1207.51
  rectangle net VMOT: 2011.49,1257.27 2155.63,1294.88
  rectangle net NetC910_2: 1927.6,863.87 2155.66,987.67
  pour cut-out: 1567.39,922.77 ccw(c1626.76,922.77) 1626.76,863.4 ccw(c1626.76,922.77) 1686.13,922.77 ccw(c1626.76,922.77) 1626.76,982.14 ccw(c1626.76,922.77)
  region net GDRVP: 1945.63,1207.51 1987.9,1207.51 1987.9,1172.6 2013.13,1147.37 2060.56,1147.37 2060.56,1039.97 1955.43,1039.97 1927.6,1067.8 1927.6,1147.37 1945.63,1165.41
  region net VMOT: 1113.78,706.26 1113.78,406.81 1251.39,269.2 2287.55,269.2 2287.55,425.23 1761.55,425.23 1492.8,693.97 1492.81,1003.26 1460.63,1003.26 1460.63,931.2 1378.14,848.7 1310.59,848.7 1310.59,805.3 1288.08,782.79 1256.27,782.79 1256.27,722.69 1239.84,706.26
  region net DRV_PHASE_C: 2330.41,1257.85 2330.41,1381.47 2391.68,1381.47 2417.68,1407.47 2417.68,1446.4 2391.43,1472.65 2330.69,1472.65 2330.69,1645.88 2655.66,1645.88 2781.74,1519.8 2781.74,1371.32 2703.2,1292.78 2529.55,1292.78 2494.62,1257.85
  region: 1639.09,666.5 1639.21,666.5 1639.21,666.39 1639.09,666.39
  region: 1648.59,653.06 1648.47,653.06 1648.47,653.18 1648.36,653.18 1648.36,653.41 1648.24,653.41 1648.24,653.53 1648.47,653.53 1648.47,653.29 1648.59,653.29 1648.59,653.18
  region net VBAT: 969.58,1188.33 1147.14,1188.33 1156.82,1198 1216.11,1198 1234.73,1216.62 1234.73,1390.26 1241.72,1397.24 1258.84,1397.24 1305.7,1444.1 1340.98,1444.1 1370.63,1473.76 1370.63,1491.22 1360.33,1501.52 1332.02,1501.52 1332.02,1491.33 1321.35,1480.66 1271.78,1480.66 1271.78,1460.97 1264.35,1453.54 1231.55,1453.54 1191.23,1413.22 1057.92,1413.22 1048.78,1422.35 1048.78,1453.54 1038.02,1464.31 973.71,1464.31 973.71,1449.21 958.49,1433.99 904.61,1433.99 904.61,1404.26 878.71,1378.36 878.71,1337.02 937.07,1337.02 969.58,1304.51
  region net NetC804_2: 807.64,512.54 784.81,512.54 750.74,546.6 750.74,575.19 764.45,588.9 764.45,652.44 735.62,681.27 710.71,681.27 693.19,698.79 664.16,698.79 664.16,720.44 701.87,720.44 717.42,704.89 744.66,704.89 791.74,660.25 791.74,589.88 807.64,573.97
  region net GDRVA: 664.16,620.67 688.57,620.67 706.7,638.8 738.55,638.8 745.64,645.89 745.64,659.31 738.89,666.06 702.8,666.06 685.82,683.04 664.16,683.04
  region net GDRVA: 1058.49,458.1 944.73,458.1 862.79,540.04 862.79,639.9 858.83,643.87 815.52,643.87 815.52,667.49 865.89,667.49 886.79,646.59 886.79,553.89 960.93,479.75 1058.49,479.75
  region net NetC804_1: 809.62,624.18 809.62,587.75 822.61,574.76 822.61,512.54 845.44,512.54 843.82,514.15 843.82,600.83 851.19,608.2 851.19,624.18
  region net +3V3: 688.57,605.71 708.98,626.12 708.98,628.36 746.39,628.36 750.56,624.18 750.56,590.76 735,575.19 735,542.71 829.64,448.07 1057.3,448.07 1057.3,423.82 803.32,423.82 664.16,562.98 664.16,605.71
  region net VIN: 999.76,582.63 1070.94,582.63 1070.94,706.53 1123.59,759.17 1153.91,759.17 1153.91,782.79 1131.07,782.79 1108.57,805.29 1086.14,805.29 1070.94,820.49 1070.94,900.15 1267.33,1096.54 1267.33,1180.29 1285.05,1198 1366.57,1198 1366.57,1285.47 1338.01,1285.47 1234.22,1181.68 1234.22,1162.21 1218.84,1146.82 1179.73,1146.82 1159.82,1126.91 1106,1126.91 1096.49,1136.42 1096.49,1165.95 949.57,1165.95 711.9,1403.38 711.9,1540.31 622.72,1540.3 622.72,1219.75 622.72,1122.91 674.32,1069.91 777.68,1069.91 834.39,1013.19 834.39,826.63 819.8,812.04 778.61,812.04 778.61,754.95 827.45,754.95
  region net +5V: 793.59,1592.65 793.59,1742.4 827.77,1776.58 1000.09,1776.58 1000.09,1717.53 959.8,1717.53 834.92,1592.65
  region net NetQ200_4: 1212.36,1160.78 1212.36,1184.4 1169.32,1184.4 1150.87,1165.95 1121.55,1165.95 1121.55,1136.42 1156.14,1136.42 1180.5,1160.78
  region net NetL201_1: 904.61,1544.23 904.61,1626.11 906.89,1628.39 1003.04,1628.39 1003.04,1572.97 974.3,1544.23 953.43,1544.23
  region net GDRVA: 970.7,1494.4 991.04,1494.4 998.13,1487.32 1048.78,1487.32 1048.78,1518.81 1000.56,1518.81 995.83,1523.54 970.7,1523.54
  region net NetL200_1: 1271.78,1581.44 1271.78,1593.25 1245.07,1619.97 1245.07,1668.1 1343.5,1668.1 1343.5,1604.34 1320.6,1581.44
  region net +3V3: 1149.74,1677.79 1149.74,1806.62 1159.84,1816.73 1340.54,1816.73 1340.54,1757.67 1270.95,1757.67 1191.07,1677.79
  region net GDRVA: 1341.47,1560.58 1364.65,1560.58 1370.63,1554.59 1370.63,1536.82 1365.26,1531.44 1341.47,1531.44
  region net 9_VBUS: 1399.36,1079.9 1401.33,1077.92 1493.84,1077.92 1493.84,1134.33 1489.47,1138.7 1469.79,1138.7 1462.43,1131.34 1462.43,1125.93 1454.47,1117.96 1439.64,1117.96 1430.42,1127.18 1430.42,1138.7 1402.86,1138.7 1399.36,1135.19 1399.36,1109.43
  region net NetC909_2: 1927.6,768.49 2155.43,768.49 2155.77,768.15 2155.77,644 2099.21,644 2096.6,646.61 2004.2,646.61 1927.6,723.21
  region net GDRVP: 1946.53,1257.47 1988.8,1257.47 1988.8,1290.39 2003.45,1305.04 2061.46,1305.03 2061.46,1407.82 1957.56,1407.82 1927.6,1377.85 1927.6,1309.81 1946.53,1290.88
  region net DRV_PHASE_A: 2330.41,358.73 2330.41,498.86 2391.68,498.86 2408.27,515.44 2408.27,578.06 2391.68,594.64 2330.69,594.64 2330.69,768.26 2426.74,768.26 2547.11,888.63 2720,888.63 2774.67,833.96 2774.67,510.28 2623.11,358.73
  region net GDRVP: 1927.6,486.99 1967.08,447.51 2061.46,447.51 2061.46,548.86 1927.6,548.86
  region net DRV_PHASE_B: 2330.83,814.22 2330.83,1156.88 2436.26,1156.88 2551.98,1272.61 2635.44,1272.61 2716.84,1238.24 2779.86,1175.22 2779.86,1021.25 2701.22,942.62 2520.25,942.62 2391.86,814.22
  region net NetC911_2: 1918.39,1522.26 2155.66,1522.26 2155.66,1645.88 1918.39,1645.88
SIG3:
  pour cut-out: 1567.39,922.77 ccw(c1626.76,922.77) 1626.76,863.4 ccw(c1626.76,922.77) 1686.13,922.77 ccw(c1626.76,922.77) 1626.76,982.14 ccw(c1626.76,922.77)
  region net VMOT: 2330.14,1428.36 2166.2,1428.36 2166.2,496.8 2094.64,425.23 1761.55,425.23 1480.52,706.26 1113.78,706.26 1113.78,406.81 1251.39,269.2 2330.14,269.2
  region net VBAT: 969.58,1188.33 1206.44,1188.33 1234.73,1216.62 1234.73,1366.16 1312.68,1444.1 1340.98,1444.1 1370.63,1473.76 1370.63,1491.22 1361.02,1500.83 1343.99,1500.83 1323.81,1480.66 1258.67,1480.66 1231.55,1453.54 1194.26,1416.24 1081.75,1416.24 1048.65,1449.35 931.18,1449.35 915.83,1433.99 878.71,1396.88 878.71,1327.62 918.96,1327.62 969.58,1277
  region net +3V3: 1149.74,1677.79 1149.74,1806.62 1159.84,1816.73 1340.54,1816.73 1340.54,1757.67 1260.67,1677.79
  region net +5V: 793.59,1592.65 793.59,1742.4 827.77,1776.58 1000.09,1776.58 1000.09,1717.53 875.21,1592.65
  region net DRV_PHASE_B: 2345.19,814.22 2345.19,1156.88 2436.26,1156.88 2551.98,1272.61 2635.44,1272.61 2716.84,1238.24 2779.86,1175.22 2779.86,1021.25 2701.22,942.62 2520.25,942.62 2391.86,814.22
  region net DRV_PHASE_C: 2345.19,1257.85 2345.19,1381.47 2391.68,1381.47 2417.68,1407.47 2417.68,1446.4 2391.43,1472.65 2330.69,1472.65 2330.69,1645.88 2655.66,1645.88 2781.74,1519.8 2781.74,1371.32 2703.2,1292.78 2529.55,1292.78 2494.62,1257.85
  region net DRV_PHASE_A: 2345.19,358.73 2345.19,498.86 2391.68,498.86 2408.27,515.44 2408.27,578.06 2391.68,594.64 2345.19,594.64 2345.19,768.26 2426.74,768.26 2547.11,888.63 2720,888.63 2774.67,833.96 2774.67,510.28 2623.11,358.73
  region net VIN: 999.76,582.63 1070.94,582.63 1070.94,706.53 1138.22,773.81 1138.22,982.08 1218.84,1062.69 1218.84,1165.95 949.57,1165.95 711.9,1403.38 711.9,1540.31 622.72,1540.3 622.72,1224.86 834.39,1013.19 834.39,747.99
SIG6:
  pour cut-out: 1567.39,922.77 ccw(c1626.76,922.77) 1626.76,863.4 ccw(c1626.76,922.77) 1686.13,922.77 ccw(c1626.76,922.77) 1626.76,982.14 ccw(c1626.76,922.77)
  region net GDRVA: 1887.28,2564.44 2006.58,2564.44 2041.31,2599.17 2045.36,2599.17 2045.36,2478.26 2025.62,2478.26 2013.03,2465.67 2013.03,2426.12 2022.28,2416.86 2064.14,2416.86 2064.14,2393.66 1860.81,2393.66 1859.78,2394.68 1859.78,2417.07 1883.29,2417.07 1894.57,2428.36 1894.57,2429.47 1925.72,2460.62 1925.72,2504.09 1920.88,2508.94 1881.96,2508.94 1880.44,2510.46 1880.44,2557.61
  region net +3V3: 1873.03,2703.85 1903.28,2703.85 1908.9,2698.24 1940.39,2698.24 1940.39,2735.64 1908.9,2735.64 1899.94,2726.68 1873.03,2726.68
  region net +3V3: 1848.88,2403.01 1848.88,2389.97 1859.78,2379.07 2063.79,2379.07 2063.79,2356.23 1852.35,2356.23 1827.23,2381.35 1827.23,2403.01
  region net +3V3: 1956.96,2632.78 1926.45,2602.28 1887.34,2602.28 1887.34,2579.44 2012.84,2579.44 2012.84,2606.57 2016.24,2609.97 2042.05,2609.97 2060.32,2591.69 2060.32,2482.06 2042.26,2464 2042.26,2426.6 2073.76,2426.6 2082,2418.35 2107.54,2418.35 2107.54,2442.76 2083.13,2442.76 2073.76,2452.14 2073.76,2468.86 2083.16,2478.26 2083.16,2599.17 2070.87,2599.16 2051.19,2618.85 2051.19,2632.8
  region net GDRVA: 1973.86,2735.64 2005.35,2735.64 2013.68,2727.31 2013.68,2717.03 2032.06,2698.65 2050.62,2698.65 2050.62,2648.32 2051.19,2647.76 1956.96,2647.74 1956.96,2670.58 1981.37,2670.58 1988.05,2677.27 1988.05,2692.75 1982.56,2698.24 1973.86,2698.24
  region net VMOT: 2330.14,1428.36 2092.62,1428.36 2092.62,997.71 2166.2,997.71 2166.2,543.77 2047.67,425.23 1587.72,425.23 1306.69,706.26 1113.78,706.26 1113.78,406.81 1251.39,269.2 2330.14,269.2
  region net +3V3: 1149.74,1677.79 1149.74,1806.62 1159.84,1816.73 1340.54,1816.73 1340.54,1706.5 1311.84,1677.79
  region net VBAT: 969.58,1188.33 1206.44,1188.33 1234.76,1216.65 1234.76,1366.19 1312.68,1444.1 1340.98,1444.1 1370.63,1473.76 1370.63,1491.22 1361.02,1500.83 1343.99,1500.83 1323.81,1480.66 1258.67,1480.66 1231.55,1453.54 1194.26,1416.24 1081.75,1416.24 1048.65,1449.35 931.18,1449.35 878.71,1396.88 878.71,1327.62 918.96,1327.62 969.58,1277
  region net +5V: 793.59,1592.65 793.59,1742.4 827.77,1776.58 1000.09,1776.58 1000.09,1717.53 959.8,1717.53 834.92,1592.65
  region net VIN: 622.72,1540.3 685.72,1540.3 685.72,1429.53 949.29,1165.95 1204.34,1165.95 1219.29,1151 1219.29,1069.91 675.73,1069.91 622.72,1122.91
  region net DRV_PHASE_C: 2345.11,1257.85 2494.62,1257.85 2529.55,1292.78 2703.2,1292.78 2781.74,1371.32 2781.74,1519.81 2655.65,1645.88 2330.66,1645.88 2330.66,1472.68 2331.08,1472.26 2391.82,1472.26 2464.85,1399.23 2464.85,1364.69 2449.56,1349.4 2391.82,1349.4 2391.82,1357.85 2345.41,1357.85
  region net NetD900_2: 2345.19,498.49 2345.19,545.74 2414.78,545.74 2453.23,507.29 2453.23,477.76 2417.79,477.76 2397.06,498.49
  region net DRV_PHASE_A: 2344.89,475.23 2391.98,475.23 2391.98,462.74 2452.89,462.74 2464.85,474.7 2464.85,521.77 2391.98,594.64 2345.19,594.64 2345.19,768.26 2426.74,768.26 2550.04,891.56 2717.07,891.56 2774.67,833.96 2774.67,510.28 2623.11,358.73 2344.6,358.73
  region net NetD901_2: 2047.84,644 2155.66,644 2155.66,596.76 2108.52,596.76 2091.07,614.21 2047.84,614.21
  region net NetC909_2: 2047.84,679.17 2083.27,679.17 2121,716.9 2155.77,716.9 2155.77,764.14 2103.28,764.14 2047.84,708.69
  region net NetC910_2: 2047.84,898.57 2083.27,898.57 2121,936.3 2155.77,936.3 2155.77,983.55 2103.28,983.55 2047.84,928.1
  region net NetD903_2: 2047.84,863.41 2155.66,863.41 2155.66,816.16 2108.52,816.16 2091.07,833.61 2047.84,833.61
  region net NetD905_2: 2047.84,1521.62 2155.66,1521.62 2155.66,1474.38 2110.52,1474.38 2093.07,1491.83 2047.84,1491.83
  region net NetC911_2: 2047.84,1556.79 2083.27,1556.79 2121,1594.52 2155.77,1594.52 2155.77,1641.76 2103.28,1641.76 2047.84,1586.31
  region net NetD902_2: 2345.19,1156.71 2345.19,1203.95 2414.78,1203.95 2453.23,1165.5 2453.23,1135.98 2417.79,1135.98 2397.06,1156.71
  region net DRV_PHASE_B: 2345.19,814.04 2391.68,814.04 2520.08,942.44 2701.05,942.44 2779.69,1021.08 2779.69,1175.4 2716.5,1238.58 2633.51,1272.61 2551.98,1272.61 2464.85,1185.48 2464.85,1130.31 2451.25,1116.7 2391.68,1116.7 2391.68,1133.45 2345.19,1133.45
  region net NetD904_2: 2345.19,1381.11 2345.19,1428.36 2418.28,1428.36 2453.23,1393.41 2453.23,1363.88 2414.29,1363.88 2397.06,1381.11
  text "https://github.com/miaow-cn/foc-hw" at 1700.23,1799.66 h10
GND2 (plane layer: these items are gaps in the copper):
  lines w30: 2311.15,798.89 2397.79,798.89 2533.9,935 2808.25,935 ; 2311.8,1243.15 2501.39,1243.15 2581.28,1323.05 2808.25,1323.05
  lines w50: 428.8,1563.84 706.84,1563.84 706.84,1408.69 977.4,1138.14 1829.16,1138.14 1829.16,1653.67 2808.25,1653.67 2808.25,341.49 2304.3,341.49 2304.3,1653.56 ; 2808.25,912.81 3115.38,912.81
  text "github.com/miaow-cn/foc-hw" at 708.28,3242.04 h50
PWR4 (plane layer: these items are gaps in the copper):
  lines w30: 2303.64,1243.15 2501.39,1243.15 2581.28,1323.05 2808.25,1323.05 ; 2305.82,798.89 2397.79,798.89 2533.9,935 2808.25,935 ; 569.56,2081.05 569.56,2981.82 792.8,2981.82 792.8,2249.04 1057.92,1983.93 1057.92,1413.22 708.73,1413.22 708.73,1941.89 569.56,2081.05
  lines w50: 428.8,1563.84 706.84,1563.84 706.84,1408.69 ; 1118.15,297.92 1118.15,725.3 1255.31,725.3 1255.31,1178.15 ; 1118.15,524.39 613.26,524.39 613.26,1408.69 706.84,1408.69 ; 2304.33,219.44 2304.33,348.39 ; 2304.33,1653.56 2304.33,348.39 ; 2808.25,912.81 3115.38,912.81 ; 706.84,1408.69 936.75,1178.78 1829.16,1178.78 1829.16,1653.67 2808.25,1653.67 2808.25,348.39 2304.33,348.39
  text "github.com/miaow-cn/foc-hw" at 708.28,3242.04 h50
GND5 (plane layer: these items are gaps in the copper):
  lines w30: 2311.15,798.89 2397.79,798.89 2533.9,935 2808.25,935 ; 2311.8,1243.15 2501.39,1243.15 2581.28,1323.05 2808.25,1323.05
  lines w50: 428.8,1563.84 706.84,1563.84 706.84,1408.69 977.4,1138.14 1829.16,1138.14 1829.16,1653.67 2808.25,1653.67 2808.25,341.49 2304.3,341.49 2304.3,1653.56 ; 2808.25,912.81 3115.38,912.81
  text "github.com/miaow-cn/foc-hw" at 708.28,3242.04 h50

## Silkscreen, mask and mechanical layers (free items; w line width, h text height)
Top Overlay:
  region: 21783 vertices and 16 holes, not listed, extent 1268.96,265.58 1565.49,543.75
  text "github.com/miaow-cn/foc-hw" at 1590.06,280.07 h80
Bottom Overlay:
  region: 21783 vertices and 16 holes, not listed, extent 763.47,343.05 1060,621.22
Bottom Solder:
  rectangle: 1495.12,1795.12 1705.12,2005.12
Mechanical 1:
  circle w10: c1626.76,922.77 r39.37
  lines w10: 359.36,416.03 ccw(c556.21,416.03) 556.21,219.18 674.32,219.18 753.06,297.92 1146.76,297.92 1225.5,219.18 2918.41,219.18 ccw(c2918.41,416.03) 3115.26,416.03 3115.26,3171.94 ccw(c2918.41,3171.94) 2918.41,3368.79 2741.48,3368.79 2741.48,3309.73 1579.83,3309.73 cw(c1501.09,3309.73) 1422.35,3309.73 733.37,3309.73 733.37,3368.79 556.21,3368.79 ccw(c556.21,3171.94) 359.36,3171.94 359.36,1675.87 cw(c359.36,1597.13) 359.36,1518.39 359.36,416.03

## Dimensions
2918.41,3368.79 to 2918.41,219.18 on Mechanical 15
359.36,3171.94 to 3115.26,3171.94 on Mechanical 15